# Altium PCB FYS_TMC5160_V1_2.PcbDoc
Units mil, origin at the board's own origin, x right, y up, seen from the top; angles counter-clockwise.
Board outline 600 x 800 mil, 6 copper layers (Top, P1, P2, VMOT, SIG, Bottom), stack 66.535 mil thick; 31 components, 45 nets, 162 pads, 113 vias.
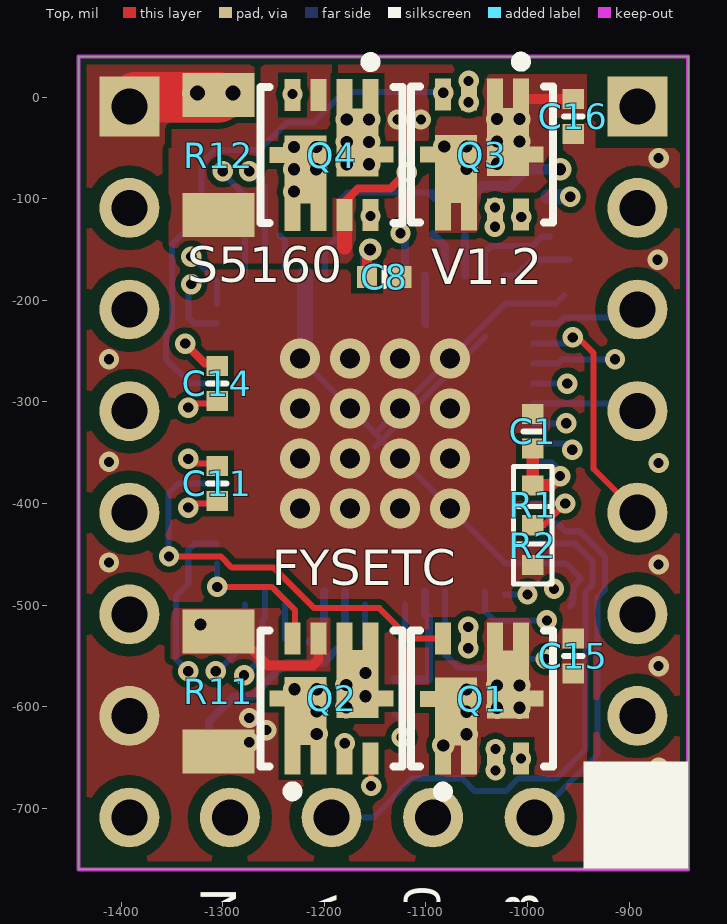
[diagram p0: Top view]
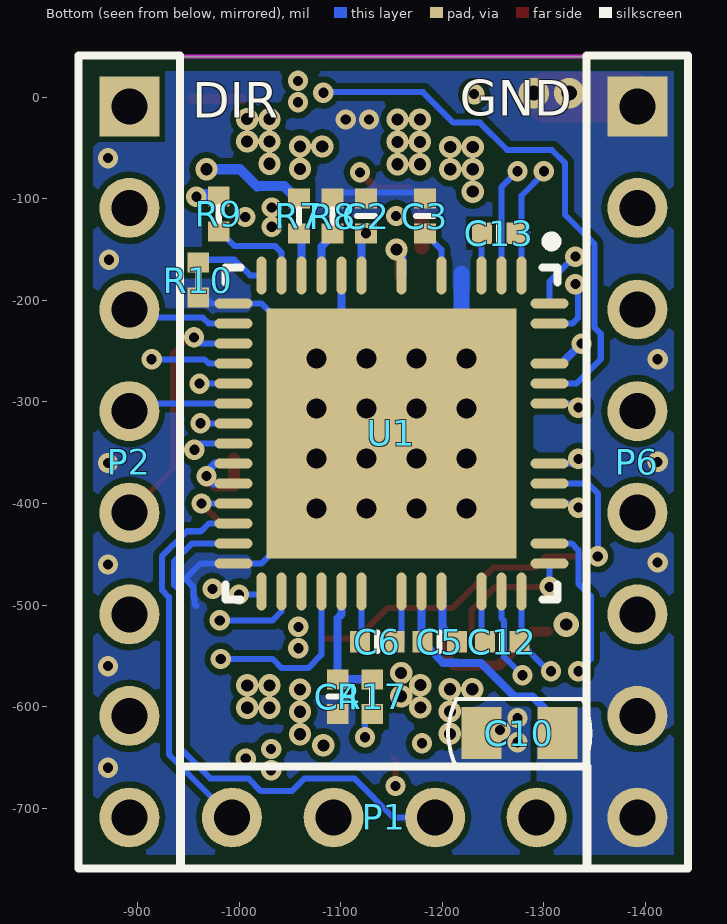
[diagram p1: Bottom view, seen from below]
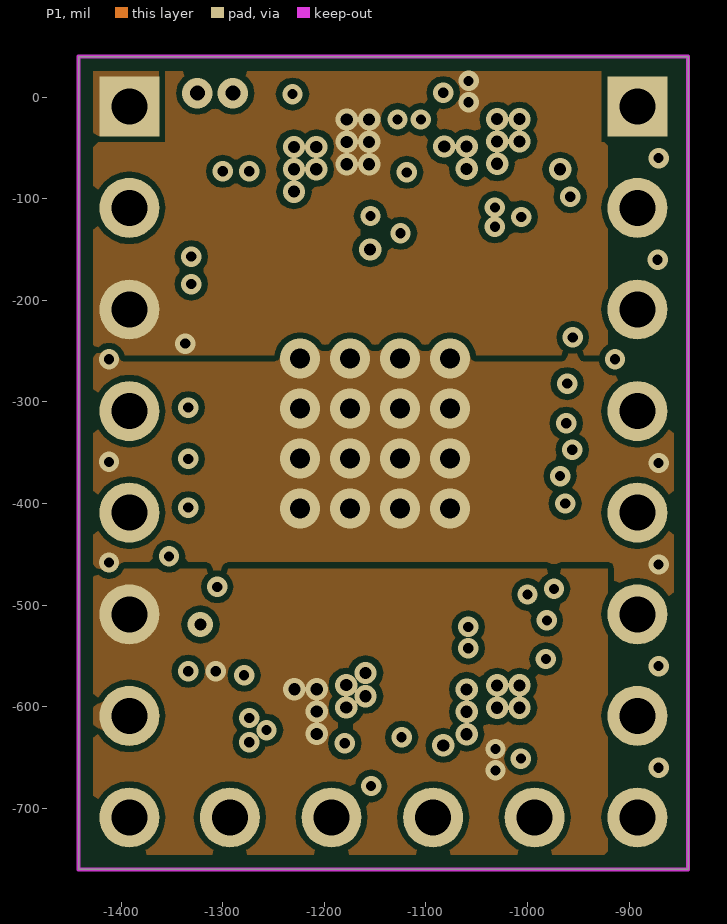
[diagram p2: P1]
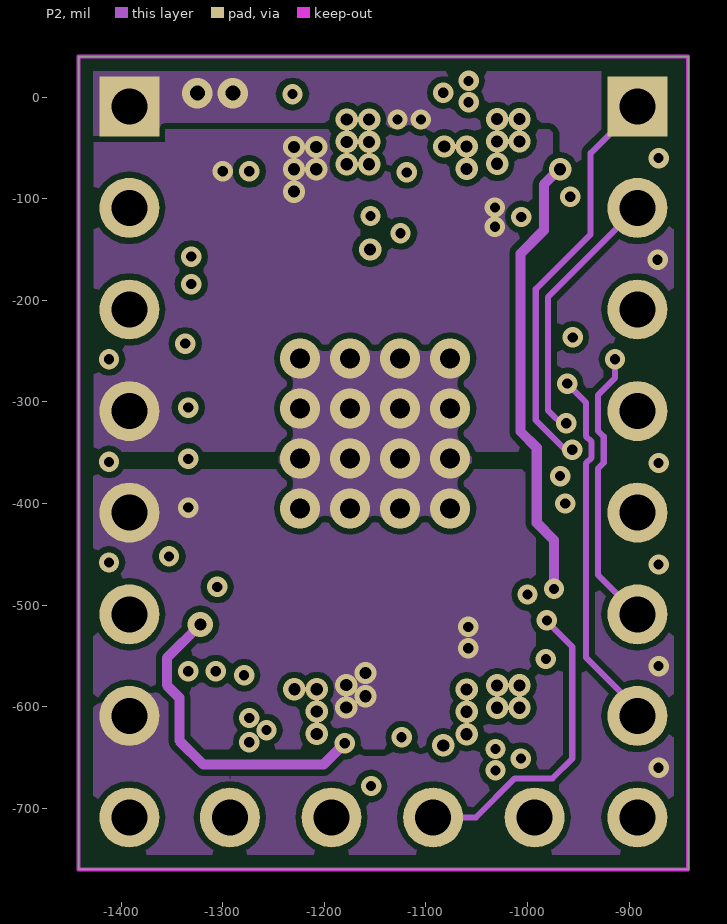
[diagram p3: P2]
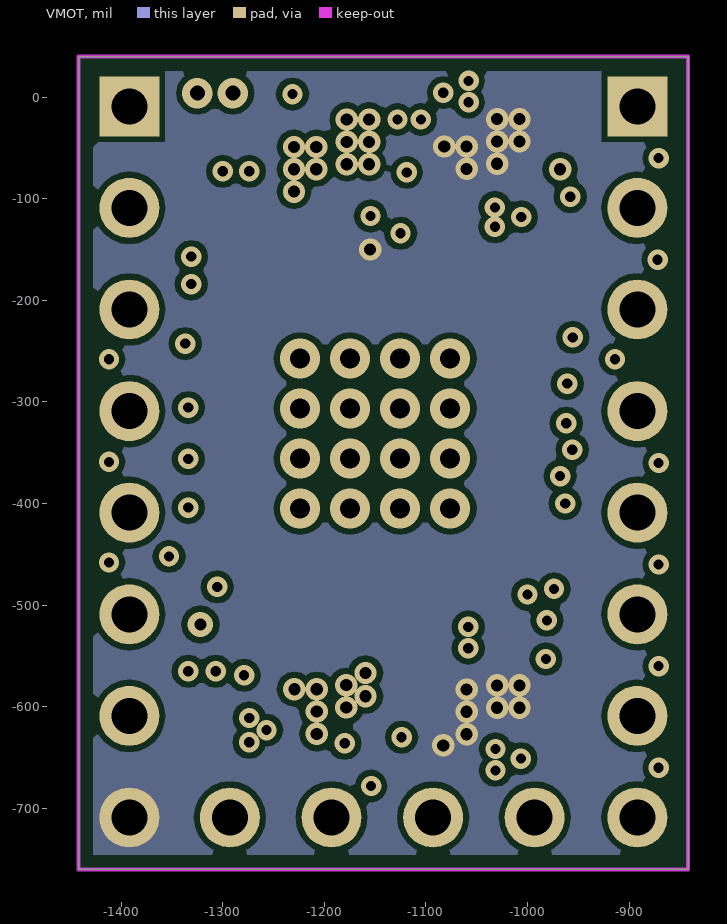
[diagram p4: VMOT]
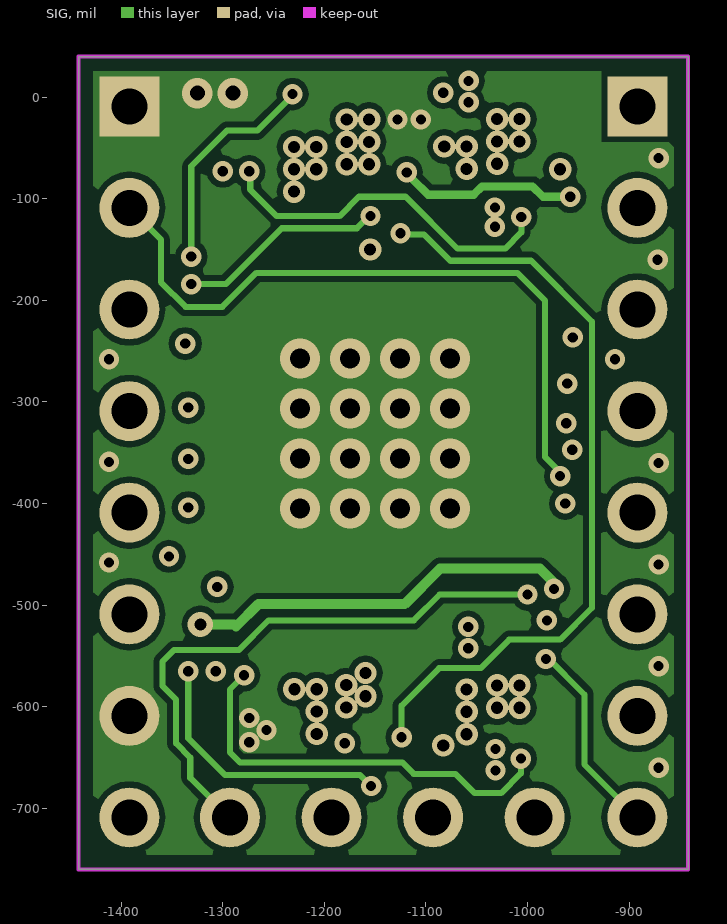
[diagram p5: SIG]
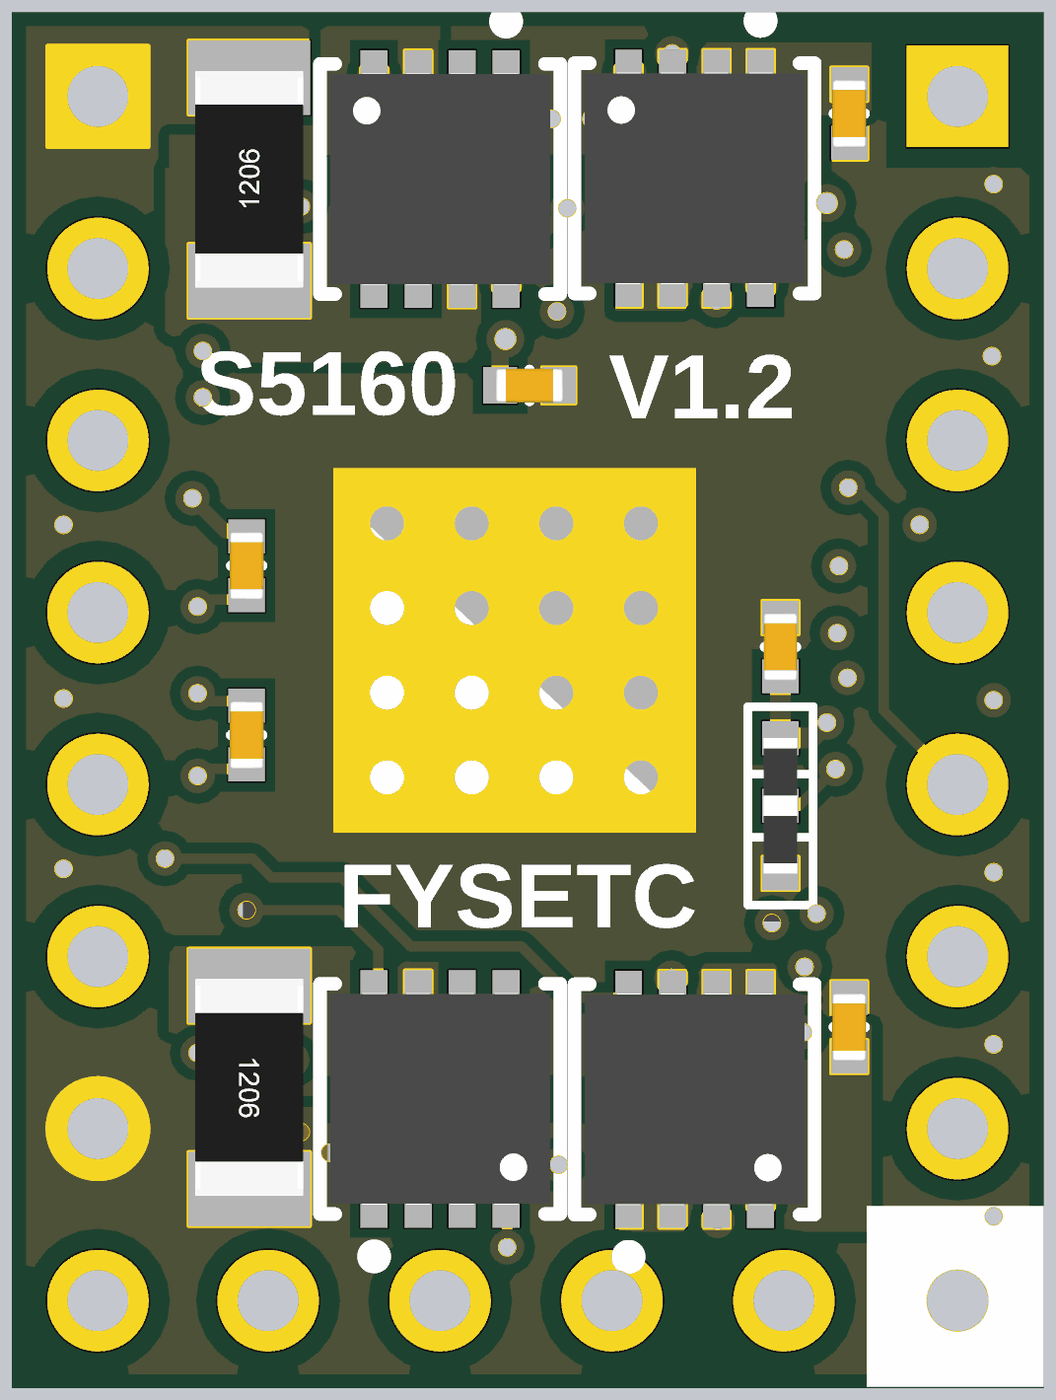
[diagram p6: 3D render of the assembled board from above, using the file's embedded part models]
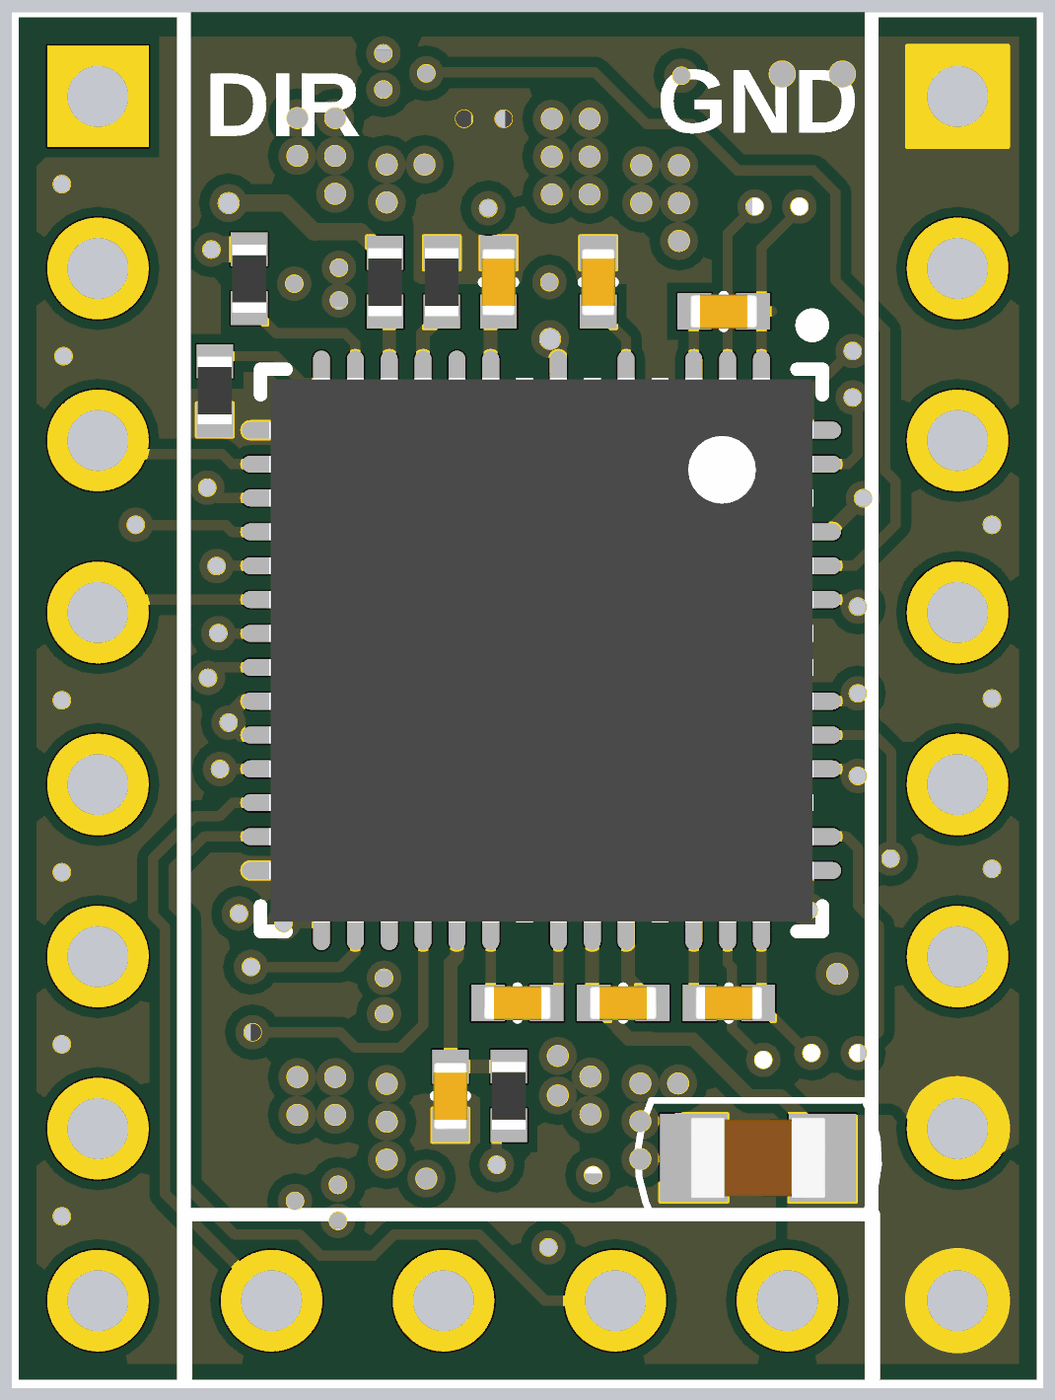
[diagram p7: 3D render of the assembled board from below, using the file's embedded part models]

## Layer stack, top to bottom
Top Solder: solder mask 0.4, Solder Resist, Dk 3.5
Top: signal copper 2.7559
Dielectric 1: core 10, FR-4, Dk 4.8
P1: signal copper 2.7559
Dielectric 2: prepreg 10, FR4, Dk 4.2
P2: signal copper 2.7559
Dielectric 3: prepreg 10, FR-4, Dk 4.2
VMOT: signal copper 2.7559
Dielectric 4: core 10, FR4, Dk 4.2
SIG: signal copper 2.7559
Dielectric 5: core 10, FR-4, Dk 4.2
Bottom: signal copper 2.7559
Bottom Solder: solder mask 0.4, Solder Resist, Dk 3.5

## Board outline
-1442,-760 -1442,40 -842,40 -842,-760

## Design rules (kind name [scope] priority, off if disabled: settings)
Clearance Clearance_1 [OnLayer('Top')] p1: gap=6 ignorepadtopadclearanceinfootprint=TRUE except(0: Arc-Hole Track-Hole SMDPad-Hole THPad-Hole Via-Hole Fill-Hole Poly-Hole Region-Hole Text-Hole; 12: THPad-Poly)
Clearance BoardOutlineClearance [OnLayer('Keep-Out Layer')] p2: gap=12 ignorepadtopadclearanceinfootprint=FALSE
Clearance "Fiducial Clearance" [HasFootprint('FIDUCIAL_40MIL')] p3: gap=26 ignorepadtopadclearanceinfootprint=FALSE except(0: Arc-Hole Track-Hole SMDPad-Hole THPad-Hole Via-Hole Fill-Hole Poly-Hole Region-Hole Text-Hole)
Clearance "Mounting Hole Clearance" [(HoleDiameter >= 110) And  IsPad  And ((PadYSize_AllLayers - HoleDiameter)  <=  1)] p4: gap=30 ignorepadtopadclearanceinfootprint=FALSE except(0: Arc-Hole Track-Hole SMDPad-Hole THPad-Hole Via-Hole Fill-Hole Poly-Hole Region-Hole Text-Hole)
Clearance [All] p5: gap=6 ignorepadtopadclearanceinfootprint=TRUE except(0: Arc-Hole Track-Hole SMDPad-Hole THPad-Hole Via-Hole Fill-Hole Poly-Hole Region-Hole Text-Hole)
ComponentClearance Pinheader2PinheaderClearance [InComponentClass('Pinheader') vs InComponentClass('Pinheader')] p1: gap=0 collisioncheckmode=3 verticalgap=0 showdistances=FALSE
ComponentClearance [All] p2: gap=0 collisioncheckmode=3 verticalgap=100000 showdistances=FALSE
DiffPairsRouting [All] p1 off: maxlimit=10 minlimit=7.5 mostfreqgap=10 toplayer_prefgap=7.5 toplayer_minwidth=7.5 toplayer_maxwidth=7.5 toplayer_prefwidth=7.5 midlayer1_prefgap=7.5 midlayer1_minwidth=7.5 midlayer1_maxwidth=7.5 midlayer1_prefwidth=7.5 midlayer2_mingap=10 midlayer2_minwidth=15 midlayer2_maxwidth=15 midlayer2_prefwidth=15 midlayer3_mingap=10 midlayer3_minwidth=15 midlayer3_maxwidth=15 midlayer3_prefwidth=15 midlayer4_mingap=10 midlayer4_minwidth=15 midlayer4_maxwidth=15 midlayer4_prefwidth=15 bottomlayer_prefgap=7.5 bottomlayer_minwidth=7.5 bottomlayer_maxwidth=7.5 bottomlayer_prefwidth=7.5 maxuncoupledlength=500
HoleSize [All] p1: absolutevalues=TRUE maxlimit=100000 minlimit=7.87 maxpercent=80.000 minpercent=20.000
HoleToHoleClearance [All] p1: gap=8 allowstackedmicrovias=TRUE
MatchedLengths "SD_CARD MatchedLengths" [InNetClass('SD_CARD')] p1: tolerance=10 checknetsindiffpair=FALSE checkdiffpairvsdiffpair=TRUE checkxsignals=TRUE checkothers=TRUE
MinimumAnnularRing MinimumViaAnnualRing [All] p1: minimumring=4.92
MinimumSolderMaskSliver STM32_MinimumSolderMaskSliver [(InComponent('STM1') AND InComponent('STM2')) vs (InComponent('STM1') AND InComponent('STM2'))] p1: minsoldermaskwidth=1
MinimumSolderMaskSliver USB_HUB_MinimumSolderMaskSliver [InComponent('USB_HUB')] p2: minsoldermaskwidth=1
MinimumSolderMaskSliver [All] p3 off: minsoldermaskwidth=1.5
PasteMaskExpansion TestPadPasteMaskExpansion [HasFootprint('SMD_TP_2X2_ROUND')] p1: expansion=-78.74
PasteMaskExpansion [All] p2: expansion=0
PlaneConnect [All] p1: planeconnectstyle=Direct reliefexpansion=20 reliefentries=4 reliefconductorwidth=10 reliefairgap=10
PolygonConnect SA_SB_PolygonConnect [InNet('SA') OR InNet('SB')] p1: connectstyle=Direct reliefconductorwidth=70 reliefentries=4 polygonreliefangle="90 Angle" airgapwidth=10
PolygonConnect VM_PolygonConnect [InNet('+VM')] p2: connectstyle=Direct reliefconductorwidth=70 reliefentries=4 polygonreliefangle="90 Angle" airgapwidth=10
PolygonConnect ThermalVias [IsVia] p3: connectstyle=Direct reliefconductorwidth=10 reliefentries=4 polygonreliefangle="90 Angle" airgapwidth=10
PolygonConnect MotorOutputConStyle [InNetClass('MotorPowerOut')] p4: connectstyle=Direct reliefconductorwidth=10 reliefentries=4 polygonreliefangle="90 Angle" airgapwidth=10
PolygonConnect [All] p5: connectstyle=Direct reliefconductorwidth=15 reliefentries=4 polygonreliefangle="90 Angle" airgapwidth=10
RoutingVias [All] p1: holewidth=12 width=22 viastyle="Through Hole" minholewidth=12 minwidth=22 maxholewidth=12 maxwidth=50
ShortCircuit [All] p1 off: allowed=FALSE
SilkToBoardRegionClearance [All] p1 off:
SilkToSilkClearance [All] p1 off: silktosilkclearance=10
SilkToSolderMaskClearance [IsPad] p1 off: minsilkscreentomaskgap=10 clearancetoexposedcopper=TRUE
SolderMaskExpansion FiducialSolderMaskExpansion [HasFootprint('FIDUCIAL_40MIL')] p1: expansion=26
SolderMaskExpansion [All] p2: expansion=4
UnRoutedNet [All] p1 off:
Width VIN_Width [InNetClass('PWR_VIN')] p1: maxlimit=300 minlimit=200 preferedwidth=210
Width Other_Width [All] p2: maxlimit=100000 minlimit=5 preferedwidth=11.81 midlayer3_prefwidth=10 midlayer4_prefwidth=10 minimp=50.000000 maximp=50.000000 favimp=50.000000
18 further rules are at their usual default settings.

## Classes and differential pairs
net class MotorPowerOut: BMA1 BMA2 BMB1 BMB2

## Components (designator, comment, footprint, x,y, rotation, side; value= is the part's Value field where it differs from the comment)
C1 "100nF" CAP0402_NS -995,-329 r90 top
C2 "2u2" CAP0402_NS -1125,-117 r90 bottom
C3 "2u2" CAP0402_NS -1183,-117 r270 bottom
C4 "470nF" CAP0402_NS -1097,-590.01 r270 bottom
C5 "100nF" CAP0402_NS -1197.5,-536 r180 bottom
C6 "22nF" CAP0402_NS -1136,-536 r180 bottom
C8 "100nF" CAP0402_NS -1141,-177 r0 top
C10 "10uF/50V/10%" CAP0805 -1276,-626 r180 bottom
C11 "220nF" CAP0402_NS -1305.51,-380.21 r270 top
C12 "220nF" CAP0402_NS -1259,-536 r180 bottom
C13 "220nF" CAP0402_NS -1256,-134 r180 bottom
C14 "220nF" CAP0402_NS -1305.51,-281.79 r90 top
C15 "470nF/50V" CAP0402_NS -955,-550 r90 top
C16 "470nF/50V" CAP0402_NS -955,-19 r270 top
P1 "Header 4" HDR1X4 -993,-709 r180 bottom locked
P2 "Header 8" HDR1X8 -892,-9 r270 bottom locked
P6 "Header 8" HDR1X8 -1392,-9 r270 bottom locked
Q1 "WSD3020DN" "DFN3X3-8L-DUAL - AON" -1044.97,-592 r0 top
Q2 "WSD3020DN" "DFN3X3-8L-DUAL - AON" -1192.97,-591.73 r0 top
Q3 "WSD3020DN" "DFN3X3-8L-DUAL - AON" -1044.97,-56.61 r180 top
Q4 "WSD3020DN" "DFN3X3-8L-DUAL - AON" -1192.97,-57 r180 top
R1 "0R" RES0402 -995,-401.68 r270 top
R2 "0R" RES0402 -995,-441 r270 top
R7 "47R /  / 1%" RES0402_NS -1059,-117 r270 bottom
R8 "47R /  / 1%" RES0402_NS -1092,-117 r270 bottom
R9 "47R /  / 1%" RES0402_NS -980,-115 r270 bottom
R10 "47R /  / 1%" RES0402_NS -960,-180 r90 bottom
R11 "75mR" R1206 -1303.97,-585 r270 top
R12 "75mR" R1206 -1303.97,-57.18 r90 top
R17 "2R2/1%/" RES0402_NS -1131,-589.99 r90 bottom
U1 "TMC5160_WA" "QFN8X8 WETTABLE" -1150,-331 r270 bottom locked

## Footprints (in the part's own frame and the unit in brackets; to place one, negate y for a bottom-side part, rotate by r counter-clockwise, add the part's x,y. Pads: shape width x height; smd on the part's side, far side on the other; paste and mask are expansions set on the pad)
CAP0402_NS [mm]
  rect 0.5x0.54 smd mask+0.025: 1(-0.433,0) 2(0.433,0)
  silkscreen extent 0,-0.23 0,0.23, body extent -0.5,-0.25 0.5,0.25, height 0.5
CAP0805 [mm]
  rect 1x1.3 smd mask+0.025: 1(-0.95,0) 2(0.95,0)
  silkscreen extent -1.78,-0.85 1.78,0.85, body extent -1,-0.6 1,0.6, height 1.2
"DFN3X3-8L-DUAL - AON" [mm] "QFN, 8-Leads, Body 3.15x3.00mm, Pitch 0.65mm, Thermal Pad 2.45x1.74mm, IPC Medium Density"
  rect 0.4x0.8 smd mask+0.025: 1(-0.325,1.5) 2(-0.975,1.5) 3(0.325,-1.5) 4(0.975,-1.5) 5(0.975,1.5) 6(0.325,1.5) 7(-0.975,-1.5) 8(-0.325,-1.5)
  rect 1.05x1.7 smd mask+0.025: 6(0.65,0.356) 8(-0.65,-0.319)
  rect 0.8x0.4 smd mask+0.025: 6(1.146,0) 8(-1.146,-0.01)
  silkscreen extent -1.78,-2.45 1.78,1.7, body extent -1.62,-1.56 1.63,1.56, height 1
HDR1X4 [mm] "Connector; Header; 4 Position"
  round 1.5 hole 0.9 mask+0.025: 1(0,0) 2(2.54,0) 3(5.08,0) 4(7.62,0)
  silkscreen extent -1.27,-1.27 8.89,1.27
HDR1X8 [mm] "Connector; Header; 8 Position"
  rect 1.5x1.5 hole 0.9 mask+0.025: 1(0,0)
  round 1.5 hole 0.9 mask+0.025: 2(2.54,0) 3(5.08,0) 4(7.62,0) 5(10.16,0) 6(12.7,0) 7(15.24,0) 8(17.78,0)
  silkscreen extent -1.27,-1.27 19.05,1.27
"QFN8X8 WETTABLE" [mm] "QFN, 56-Leads, Body 8.00x8.00mm, Pitch 0.50mm, Thermal Pad 6.25x6.25mm, IPC Low Density"
  oval 0.95x0.25 smd mask+0.025: 1(-3.95,3.25) 2(-3.95,2.75) 3(-3.95,2.25) 4(-3.95,1.25) 5(-3.95,0.25) 6(-3.95,-0.75) 7(-3.95,-1.25) 8(-3.95,-1.75) 9(-3.95,-2.25) 10(-3.95,-2.75) 11(-3.95,-3.25) 26(3.95,-3.25) 27(3.95,-2.75) 28(3.95,-2.25) 29(3.95,-1.75) 30(3.95,-1.25) 31(3.95,-0.75) 32(3.95,0.25) 33(3.95,0.75) 34(3.95,1.25) 35(3.95,2.25) 36(3.95,2.75) 37(3.95,3.25)
  oval 0.25x0.95 smd mask+0.025: 12(-3.25,-3.95) 13(-2.75,-3.95) 14(-2.25,-3.95) 15(-1.75,-3.95) 16(-1.25,-3.95) 17(-0.75,-3.95) 18(-0.25,-3.95) 19(0.25,-3.95) 20(0.75,-3.95) 21(1.25,-3.95) 22(1.75,-3.95) 23(2.25,-3.95) 24(2.75,-3.95) 25(3.25,-3.95) 38(3.25,3.95) 39(2.75,3.95) 40(1.75,3.95) 41(1.25,3.95) 42(0.75,3.95) 43(-0.75,3.95) 44(-1.25,3.95) 45(-1.75,3.95) 46(-2.75,3.95) 47(-3.25,3.95)
  rect 6.25x6.25 smd mask+0.025: 48(0,0)
  silkscreen extent -4.92,-4.15 4.15,4.15, body extent -4.02,-4.02 4.02,4.02, height 0.85
R1206 [mm] "1206 resistor"
  rect 1.1x1.8 smd mask+0.025: 1(-1.5,0) 2(1.5,0)
  body extent -1.6,-0.8 1.6,0.8, height 0.6
RES0402 [mm]
  rect 0.5x0.54 smd mask+0.025: 1(-0.5,0) 2(0.5,0)
  silkscreen extent -0.97,-0.48 0.97,0.48, body extent -0.5,-0.25 0.5,0.25, height 0.5
RES0402_NS [mm]
  rect 0.5x0.54 smd mask+0.025: 1(-0.433,0) 2(0.433,0)
  silkscreen extent -0.18,0 0.18,0, body extent -0.5,-0.25 0.5,0.25, height 0.5

## Part data
C1 C8: library part Capacitor, "Ceramic capacitor", Manufacturer=Multicomp, MPN=MC0603F104M500CT, Voltage rating=50V, Capacitance=100nF, ComponentLinknDescription=Datasheet, Precision=20%, Type=MLCC
C2 C3: library part "2.2 μF, 25 V, ± 10%, X5R, GRM Series", "SMD Multilayer Ceramic Capacitor, 0603 [1608 Metric], 2.2 μF, 25 V, ± 10%, X5R, GRM Series", MPN=GRM188R61E225KA12D, Voltage rating=50V, Capacitance=2u2, ComponentLinknDescription=Datasheet, MF=MURATA, Precision=10%, Type=MLCC
C4: library part Capacitor, "Ceramic capacitor", MPN=MC0603X474K160CT, Voltage rating=16V, Capacitance=470nF, ComponentLinknDescription=Datasheet, MF=Multicomp, Precision=10%, Type=MLCC
C5: library part Capacitor, "Ceramic capacitor", MPN=MC0603F104M500CT, Voltage rating=50V, Capacitance=100nF, ComponentLinknDescription=Datasheet, MF=Multicomp, Precision=20%, Type=MLCC
C6: library part Capacitor, "Ceramic capacitor", MPN=MC0603B223K500CT, Voltage rating=50V, Capacitance=22nF, ComponentLinknDescription=Datasheet, MF=Multicomp, Precision=20%, Type=MLCC
C10: library part "10 μF, 50 V, ± 20%, X5R, GRM Series", "SMD Multilayer Ceramic Capacitor, 1206 [3216 Metric], 10 μF, 50 V, ± 20%, X5R, GRM Series", Capacitance=10uF, MPN=GRM31CR61H106MA12L, VoltageRating=50V, ComponentLinknDescription=Datasheet, MF=MURATA, Precision=10%, Type=MLCC
C11 C12 C13 C14: library part "0.22 μF, 50 V, ± 10%, X7R", "SMD Multilayer Ceramic Capacitor, 0603 [1608 Metric], 0.22 μF, 50 V, ± 10%, X7R, GCM Series", MPN=GCM188R71H224KA64D, Voltage rating=50V, Capacitance=220nF, ComponentLinknDescription=Datasheet, MF=MURATA, Precision=10%, Type=MLCC
C15 C16: library part "0.47 μF, 50 V, ± 10%, X7R, C Series", "SMD Multilayer Ceramic Capacitor, 0603 [1608 Metric], 0.47 μF, 50 V, ± 10%, X7R, C Series", Capacitance=470nF, MPN=C1608X7R1H474K080AC, VoltageRating=50V, ComponentLinknDescription=Datasheet, MF=TDK, Precision=10%, Type=MLCC
P1: "Header, 4-Pin", LatestRevisionDate=17-Jul-2002, LatestRevisionNote="Re-released for DXP Platform.", Publisher="Altium Limited"
P2 P6: "Header, 8-Pin", LatestRevisionDate=17-Jul-2002, LatestRevisionNote="Re-released for DXP Platform.", Publisher="Altium Limited"
Q1 Q2 Q3 Q4: library part IRF7103, "HEXFET Power MOSFET", Code_IPC=SOIC127P600-8, Code_JEDEC=MS-012-AA, ComponentLink1Description="Manufacturer Link", ComponentLink1URL=http://www.irf.com/, ComponentLink2Description=Datasheet, ComponentLink2URL=http://www.irf.com/product-info/datasheets/data/irf7103.pdf, DatasheetVersion=Aug-1997, LatestRevisionDate=13-Apr-2006, LatestRevisionNote="IPC-7351 Footprint Added.", PackageDescription="8-Pin Plastic Small Outline Integrated Circuit 1.27 mm Pitch", PackageReference=SO-8, PackageVersion=Feb-2001, Published=8-Jun-2000, Publisher="Altium Limited"
R1 R2: library part "0 ohm, 0603 [1608 Metric], 100 mW, MCWR Series", "SMD Chip Resistor, Thick Film, 0 ohm, 0603 [1608 Metric], 100 mW, MCWR Series", MPN="MCWR06X000 PTL", PowerRating=100mW, Temp coefficient=*ppm, MF=MULTICOMP, Resistance=0R
R7 R8 R9 R10: library part "47 ohm, 75 V, 0603 [1608 Metric], 100 mW, ± 1%, MCSR 06 Series", "SMD Chip Resistor, Ceramic, 47 ohm, 75 V, 0603 [1608 Metric], 100 mW, ± 1%, MCSR 06 Series", MPN=MCSR06X47R0FTL, Resistance=47R, Temp coefficient=*ppm, MF=MULTICOMP, Precision=1%
R11 R12: library part "R_SENS, 0.075 ohm, 1206, 1W, ± 1%, ERJ Series", "SMD Chip Resistor, Thick Film, Current Sense Resistors - SMD 1W 0.075ohm 1%", MPN=ERJ-8BWFR075V, PowerRating=1W, Temp coefficient=*ppm, VoltageRating=50V, MF="Panasonic Electronic Components", Precision=1%, Resistance=75mR
R17: library part Resistor, "Resistor", MPN=MC0063W060312R2, Power rating=*mW, Resistance=2R2, Temp coefficient=*ppm, Voltage rating=*V, ComponentLinknDescription=Datasheet, MF=Multicomp, Precision=1%

## Via types
v1: diameter 20, hole 10, Top to Bottom, tented both sides, 57 vias
v2: diameter 22, hole 12, Top to Bottom, tented both sides, 37 vias
v3: diameter 39.37, hole 19.68, Top to Bottom, tented both sides, 16 vias
v4: diameter 30, hole 15, Top to Bottom, tented both sides, 2 vias
v5: diameter 25, hole 12, Top to Bottom, tented both sides, 1 vias

## Nets (pads, with @x,y where several pads share a name; then routed paths per layer and width w, separated by ;. In a path a pad name is that pad's centre, name@x,y a point inside that pad or via, vN(x,y) a via of type N, cw(c..) or ccw(c..) an arc to the next point about the centre after c; other vN are vias at no path point)
5V_OUT: C2.1 R17.1 U1.6 | length 834.5
  SIG w6: v1@-1126,-135 -1102,-135 -1076,-161 -996.58,-161 -936.58,-221 -936.58,-502.58 -968,-534 -1018,-534 -1046,-562 -1087,-562 -1124,-599 v1(-1124,-630)
  Bottom w6: R17.1 -1124,-614.03 v1(-1124,-630) v1@-1124,-631 ; C2.1@-1121,-133 C2.1@-1120.47,-133.53
  Bottom w8: U1.6 C2.1@-1120.47,-133.53
  other v1: -1125,-134
+VM: C5.1 C8.1 C10.2 C15.1 C16.1 P6.8 Q1.5 Q1.6 Q1.7 Q1.8 Q3.5 Q3.6 Q3.7 Q3.8 U1.5 U1.33 | length 352.2
  Top w10: C8.1 -1158.06,-154.06 v2@-1152,-148 ; Q3.7@-1003,-2 -1002.94,-1.94 C16.1 C16.1@-954,-1.94
  Bottom w8: C10.2 -1313.4,-614.4 -1289,-590 -1271,-590 -1238,-557 -1214,-557 ; U1.33 -1179.53,-535.09 C5.1 -1194.69,-550.25 -1194.69,-550.77 -1200.55,-556.63 ; -1214,-557 -1200.92,-557 ; -1214,-557 -1213.63,-556.63 -1200.92,-556.63 ; -1200.92,-557 -1200.92,-556.63 ; -1200.92,-557 -1200.55,-556.63 ; -1200.92,-556.63 -1200.55,-556.63
  Bottom w10: U1.5 -1159.84,-151.84 v2@-1155,-147
  other v2: -1083,-638 -1060,-627 -1060,-605 -1030,-601 -1008,-601 -1060,-583 -1030,-579 -1008,-579 -1155,-150 -1059.97,-70.61 -1029.97,-65.61 -1081.97,-48.61 -1059.97,-48.61 -1029.97,-43.61 -1007.97,-43.61 -1029.97,-21.61 -1007.97,-21.61
BMA1: C11.2 P6.5 Q1.1 Q2.5 Q2.6 U1.40 | length 60.4
  Top w6: v1(-1334,-404) -1329.9,-399.9 C11.2@-1305.51,-399.9
  Bottom w6: v1(-1334,-404) -1329.9,-399.9 U1.40
  other v1: -1058.39,-542.35 -1058.39,-521.35
  other v2: -1178.49,-600.73 -1159.49,-589.73 -1178.49,-578.73 -1159.49,-566.73
BMA2: C12.2 P6.6 Q1.3 Q2.7 Q2.8 U1.37 | length 77.2
  Bottom w6: v1(-1307,-565) -1305.03,-565 C12.2 ; C12.2@-1277.95,-533.73 U1.37@-1277.95,-499.51
  other v1: -1031.61,-662.65 -1031.61,-641.65
  other v2: -1207.49,-626.73 -1207.49,-604.73 -1229.49,-582.73 -1207.49,-582.73
BMB1: C13.2 P6.4 Q3.1 Q4.5 Q4.6 U1.1 | length 118.8
  Bottom w6: v1@-1302,-73 -1278,-97 -1278,-129.04 C13.2 ; -1284,-134 C13.2@-1280.04,-134 ; U1.1 -1277.95,-134.95 C13.2@-1277,-134
  other v1: -1032.18,-127.61 -1032.18,-108.61 -1300,-73
  other v2: -1229.97,-93 -1229.97,-71 -1207.97,-71 -1229.97,-49 -1207.97,-49
BMB2: C14.2 P6.3 Q3.3 Q4.7 Q4.8 U1.45 | length 79.2
  Top w8: v1(-1337,-242.57) -1317.47,-262.1 C14.2@-1305.51,-262.1
  Bottom w8: v1(-1337,-242.57) -1317.47,-262.1 U1.45
  other v1: -1058,-5 -1058,16
  other v2: -1177.97,-66 -1155.97,-66 -1177.97,-44 -1155.97,-44 -1177.97,-22 -1155.97,-22
CA1: C11.1 U1.42 | length 60.7
  Top w6: v1(-1334,-356) -1329.47,-360.53 C11.1@-1305.51,-360.53
  Bottom w6: v1(-1334,-356) -1329.47,-360.53 U1.42
CA2: C12.1 U1.35 | length 34.5
  Bottom w6: C12.1@-1238.58,-534 U1.35@-1238.58,-499.51
CB1: C13.1 U1.3 | length 41.7
  Bottom w6: C13.1@-1244,-136 -1238.58,-141.42 U1.3
CB2: C14.1 U1.43 | length 60.4
  Top w6: v1(-1334,-305.57) -1329.9,-301.47 C14.1@-1305.51,-301.47
  Bottom w6: v1(-1334,-305.57) -1329.9,-301.47 U1.43
CLK16: P2.3 U1.13 | length 104.9
  Bottom w6: U1.13 -970,-222.73 -964.27,-217 P2.3@-894,-217 ; P2.3@-894,-209 P2.3
CSN: P2.5 U1.14 | length 243.2
  Top w6: v1@-950.58,-236.42 -935,-252 -935,-366 P2.5
  Bottom w6: U1.14 -961.58,-242.42 v1(-955.58,-236.42) v1@-950.58,-236.42
DIAG0/ERROR: P1.2 U1.27 | length 396.3
  P2 w6: P1.2 -1051,-709 -1012.47,-670.47 -975.47,-670.47 -956,-651 -956,-541 -981,-516 v1(-981,-515) v1@-981,-513
  Bottom w6: U1.27 -1041.73,-506.27 -1033,-515 v1@-983,-515 ; v1(-981,-515) v1@-983,-515 ; v1@-981,-513 v1@-983,-515
DIAG1/INDEX: U1.28
DIR/REFR: P2.1 U1.19 | length 439.4
  P2 w6: v1(-956,-347) -962.87,-347 -992,-317.87 -992,-189 -938,-135 -938,-55 P2.1
  Bottom w6: U1.19 -962.16,-340.84 v1(-956,-347)
DRV_ENN: P2.8 U1.29 | length 366.5
  SIG w6: v1@-982,-551 -981,-551 -944,-588 -944,-657 P2.8
  Bottom w6: U1.29 -1081.1,-548.9 -1068,-562 -1042,-562 -1033,-553 v1(-982,-553)
ENCA: P1.3 U1.24 | length 541.9
  Bottom w6: P1.3 -1152,-709 -1113.47,-670.47 -1064.53,-670.47 -1052,-683 -1021.49,-683 -1008.96,-670.47 -971.47,-670.47 -943,-642 -943,-487.03 -936,-480.03 -936,-457 -953.73,-439.27 U1.24
ENCB: P1.1 U1.23 | length 369.5
  Bottom w6: U1.23 -970.42,-419.58 -962.73,-427.27 -948.76,-427.27 -924,-452.03 -924,-485 -931,-492 -931,-646.97 -932,-647.97 P1.1
ENCN: P1.4 U1.26 | length 589.8
  SIG w6: P1.4 -1332,-670 -1332,-649.97 -1346,-635.97 -1346,-593 -1359.49,-579.51 -1359.49,-555.64 -1347.85,-544 -1284,-544 -1255,-515 -1112,-515 -1086.51,-489.51 v1(-1000,-489.51)
  Bottom w6: U1.26@-1022.05,-489.51 v1(-1000,-489.51)
GND: C1.2 C2.2 C3.1 C4.2 C8.2 C10.1 C15.2 C16.2 P6.1 P6.7 R2.2 R8.1 R10.1 R11.2 R12.2 U1.7 U1.12 U1.25 U1.48 | length 1118.3
  Top w6: P6.1@-1394,-6 P6.1@-1386.12,1.88
  Top w50: P6.1@-1386.12,-0.12 R12.2@-1303.97,-0.12
  Bottom w6: U1.48@-1218,-263 U1.48 ; C3.1 -1177.06,-94 R8.1@-1090,-94 ; U1.48@-1150,-344 U1.48@-1143.5,-337.5 ; U1.48@-1100.79,-223.21 U1.48@-1100,-224 ; R8.1@-1096.95,-95 R8.1 ; U1.48@-1041.73,-235.73 U1.48@-1143.5,-337.5 ; R10.1@-964,-195 -972.05,-203.05 U1.12 -994.49,-203.19 -1022.19,-203.19 U1.48 ; -958,-501 -958,-500.87 -956,-498.87 -956,-492.87 -955,-491.87 -955,-482.06 -948,-475.06 -948,-473 -962.05,-458.95 U1.25 -994.49,-458.81 -1022.19,-458.81 -1124.9,-356.1 U1.48@-1143.5,-337.5 ; U1.48 U1.48@-1143.5,-337.5
  Bottom w8: U1.48@-1100.79,-223.21 U1.7
  Bottom w16: U1.48@-1219,-263 -1219,-174
  other v1: -871,-660 -1274,-635 -1257,-623 -1274,-611 -871,-560 -871,-460 -1412,-458 -871,-360 -1412,-359 -1412,-258 -872,-160 -871,-60 -1128,-22 -1105,-22
  other v3: -1223.82,-404.82 -1174.61,-404.82 -1125.39,-404.82 -1076.18,-404.82 -1223.82,-355.61 -1174.61,-355.61 -1125.39,-355.61 -1076.18,-355.61 -1223.82,-306.39 -1174.61,-306.39 -1125.39,-306.39 -1076.18,-306.39 -1223.82,-257.18 -1174.61,-257.18 -1125.39,-257.18 -1076.18,-257.18
  other v4: -1325,4 -1290,4
HA1: Q1.2 U1.41 | length 416.9
  Top w6: v1(-1353,-452) -1302,-452 -1291,-463 -1250,-463 -1210,-503 -1146,-503 -1116.06,-532.94 Q1.2
  Bottom w6: v1@-1353.47,-452 -1353.47,-390.47 -1343.21,-380.21 U1.41
HA2: Q1.4 U1.36 | length 498.4
  SIG w6: v1(-1279,-569) -1293,-583 -1293,-645 -1283,-655 -1123,-655 -1112,-666 -1071,-666 -1052,-685 -1026,-685 -1006.61,-665.61 v1(-1006.61,-651.06)
  Bottom w6: v1(-1279,-569) -1260.78,-550.78 -1260.78,-515.25 -1258.27,-512.73 U1.36
HB1: Q3.2 U1.2 | length 460.1
  SIG w6: v1@-1273,-70 -1273,-91 -1247,-117 -1185,-117 -1166,-98 -1120,-98 -1069,-149 -1022,-149 -1006.18,-133.18 ; v1(-1006.18,-117.87) -1006.18,-133.18 ; -1006,-133 -1006.18,-133.18
  Bottom w6: v1@-1276,-73 v1@-1275,-74 ; v1(-1274,-73) -1258.27,-88.73 U1.2
HB2: Q3.4 U1.44 | length 534.8
  Bottom w6: U1.44 -1332.21,-281.79 -1356,-258 -1356,-233 -1350,-227 -1350,-145 -1321,-116 -1321,-65 -1308,-52 -1264,-52 -1237,-25 -1211,-25 -1181,5 v1@-1083,5
  other v1: -1083,4.41
LA1: Q2.4 U1.39 | length 451.8
  Top w6: v1@-1154,-676 -1154,-652.68 Q2.4@-1152.1,-650.79
  SIG w6: v1@-1334,-570 -1334,-631 -1298,-667 -1165,-667 v1(-1154,-678)
  Bottom w6: v1@-1334,-570 v1(-1334,-565) -1346.18,-552.82 -1346.18,-491.18 -1334,-479 -1334,-446 -1327.27,-439.27 U1.39
LA2: Q2.2 U1.38 | length 138.8
  Top w6: v1(-1305.51,-482) -1252,-482 -1228.87,-505.13 Q2.2@-1228.87,-532.68
  Bottom w6: v1@-1305.51,-484 v1(-1305.51,-482) U1.38
LB1: Q4.4 U1.47 | length 274.9
  SIG w6: v1(-1331,-157) -1331,-68 -1296,-33 -1266,-33 v1@-1232,1 ; v1@-1232.5,1.5 v1@-1231,3
  Bottom w6: v1@-1330,-157 -1305.51,-181.49 U1.47
  other v1: -1231.36,3
LB2: Q4.2 U1.46 | length 272.5
  SIG w6: v1(-1331,-184) -1297,-184 -1242,-129 -1168,-129 v1@-1154,-115
  Bottom w6: v1@-1331,-182 -1333.77,-184.77 -1333.77,-217.23 -1328.27,-222.73 U1.46
  other v1: -1154.59,-117
NetC3_2: C3.2 U1.4 | length 45.4
  Bottom w6: U1.4 -1199.21,-150.21 C3.2@-1185,-136
NetC5_2: C5.2 U1.34 | length 56.5
  Bottom w8: C5.2 -1200.28,-521.75 -1200.28,-486.51 U1.34
NetC6_1: C6.1 U1.31 | length 35
  Bottom w6: U1.31@-1120.47,-499.51 -1120.47,-532.84 C6.1@-1119.31,-534
NetC6_2: C6.2 U1.32 | length 41.3
  Bottom w6: C6.2@-1159.84,-540.84 U1.32@-1159.84,-499.51
SA: Q2.1 Q2.3 R7.1 R11.1 | length 1385.6
  Top w10: R11.1 -1289.06,-525.94 -1255.57,-559.43 -1211.43,-559.43 -1205.77,-553.77 Q2.1
  P2 w10: v5(-1322,-519) -1355,-552 -1355,-578.7 -1342.7,-591 -1342.7,-633.3 -1319,-657 -1201,-657 v1(-1180,-636) ; v1(-974,-484) -974,-436 -991,-419 -991,-345 -1007,-329 -1007,-154 -984,-131 -984,-86 v2@-965,-67
  SIG w10: v5(-1322,-519) -1289,-519 -1287,-521 -1265,-499 -1121,-499 -1086,-464 -988,-464 -974,-478 v1(-974,-484)
  Bottom w10: R7.1 -1056.95,-99.95 -1044.61,-87.61 -1017.61,-87.61 ; -1018,-88 -1017.61,-87.61 ; v2(-968,-71) -1001,-71 -1017.61,-87.61
SB: Q4.1 Q4.3 R9.1 R12.1 | length 302.7
  Top w8: Q4.1 -1180.18,-103.18 -1167,-90 -1135,-90 v1(-1119,-74)
  Top w15: -1180.18,-147.61 Q4.1
  SIG w8: v1@-1112.5,-81.5 -1098,-96 -1053,-96 -1045,-88 -995,-88 -985,-98 v1(-958,-98)
  Bottom w15: R9.1 v1@-963,-97.95
SCK: P2.6 U1.15 | length 360.6
  P2 w6: v1(-914,-258) -914,-276.51 -930.53,-293.04 -930.53,-328.63 -925,-334.16 -925,-359.84 -930.53,-365.37 -930.53,-470.47 -906.51,-494.49 P2.6
  Bottom w6: U1.15 -970,-262.1 -966,-258.1 -914.1,-258.1 v1(-914,-258)
SD_MODE: C1.1 P6.2 R1.1 U1.20 U1.21 | length 798.8
  Top w12: C1.1@-995,-355.68 R1.1 -977,-382 v1(-968,-373)
  SIG w6: P6.2 -1361,-140 -1361,-182 -1336.5,-206.5 -1300.5,-206.5 -1267,-173 -1010,-173 -983,-200 -983,-354 -968,-369 v1(-968,-373)
  Bottom w8: U1.21 -975.21,-380.21 v1(-968,-373) -968,-369 -976.47,-360.53 U1.20
SDI: P2.7 U1.16 | length 373.1
  P2 w6: v1(-961,-282) -942.53,-300.47 -942.53,-333.6 -937,-339.13 -937,-354.87 -942.53,-360.4 -942.53,-551.47 P2.7@-900,-594
  Bottom w6: U1.16 v1@-963.21,-281.79
SDO: P2.4 U1.17 | length 105.6
  Bottom w6: U1.17 -899.53,-301.47 P2.4
SPI_MODE: R1.2 R2.1 U1.22 | length 72.3
  Top w6: R2.1 -984.31,-421.31 v1(-963,-400)
  Bottom w6: U1.22 v1@-963,-399.9
SRAH: R7.2 U1.9 | length 39.7
  Bottom w6: R7.2@-1061.42,-136.42 R7.2@-1061,-136
  Bottom w8: U1.9 R7.2@-1061.42,-136.42
SRAL: R8.2 U1.8 | length 45.4
  Bottom w8: R8.2@-1093,-135 -1081.1,-146.9 U1.8
SRBH: R9.2 U1.10 | length 93
  Bottom w6: U1.10 -1041.73,-152.73 -1035.61,-146.61 -995.61,-146.61 -986,-137 R9.2@-978,-137
SRBL: R10.2 U1.11 | length 69.5
  Bottom w6: U1.11 -1011,-175.49 -995.51,-160 R10.2@-959,-160
STEP/REFL: P2.2 U1.18 | length 295.4
  P2 w6: v1@-962,-326 -980,-308 -980,-197 P2.2
  Bottom w6: U1.18 -966.84,-321.16 v1@-962,-326
  other v1: -962,-321
VCC: C4.1 R17.2 U1.30 | length 122
  Bottom w8: R17.2 C4.1 -1097,-512.9 -1100.79,-509.11 U1.30
copper on no net: | length 78248
  Top w1: 1266.18,-711.56 1343.74,-634 1463.74,-514 1583.74,-394 1703.74,-274 1823.74,-154 ; 1266.18,-651.56 1283.74,-634 1403.74,-514 1523.74,-394 1643.74,-274 1763.74,-154 1823.74,-94 ; 1266.18,-591.56 1343.74,-514 1463.74,-394 1583.74,-274 1703.74,-154 1823.74,-34 ; 1266.18,-531.56 1283.74,-514 1403.74,-394 1523.74,-274 1643.74,-154 1763.74,-34 1823.74,26 ; 1266.18,-471.56 1343.74,-394 1463.74,-274 1583.74,-154 1703.74,-34 1823.74,86 ; 1266.18,-411.56 1283.74,-394 1403.74,-274 1523.74,-154 1643.74,-34 1763.74,86 1823.74,146 ; 1266.18,-351.56 1343.74,-274 1463.74,-154 1583.74,-34 1703.74,86 1823.74,206 ; 1266.18,-291.56 1283.74,-274 1403.74,-154 1523.74,-34 1643.74,86 1763.74,206 1823.74,266 ; 1266.18,-231.56 1343.74,-154 1463.74,-34 1583.74,86 1703.74,206 1823.74,326 ; 1266.18,-171.56 1283.74,-154 1403.74,-34 1523.74,86 1643.74,206 1763.74,326 1823.74,386 ; 1266.18,-111.56 1343.74,-34 1463.74,86 1583.74,206 1703.74,326 1823.74,446 ; 1266.18,-51.56 1283.74,-34 1403.74,86 1523.74,206 1643.74,326 1763.74,446 1823.74,506 ; 1266.18,8.44 1343.74,86 1463.74,206 1583.74,326 1703.74,446 1823.74,566 ; 1266.18,68.44 1283.74,86 1403.74,206 1523.74,326 1643.74,446 1763.74,566 1823.74,626 ; 1266.18,128.44 1343.74,206 1463.74,326 1583.74,446 1703.74,566 1823.74,686 ; 1266.18,188.44 1283.74,206 1403.74,326 1523.74,446 1643.74,566 1763.74,686 1823.74,746 ; 1266.18,248.44 1343.74,326 1463.74,446 1583.74,566 1703.74,686 1823.74,806 ; 1266.18,308.44 1283.74,326 1403.74,446 1523.74,566 1643.74,686 1763.74,806 1823.74,866 ; 1266.18,368.44 1343.74,446 1463.74,566 1583.74,686 1703.74,806 1823.74,926 ; 1266.18,428.44 1283.74,446 1403.74,566 1523.74,686 1643.74,806 1763.74,926 1823.74,986 ; 1266.18,488.44 1343.74,566 1463.74,686 1583.74,806 1703.74,926 1823.74,1046 ; 1266.18,548.44 1283.74,566 1403.74,686 1523.74,806 1643.74,926 1763.74,1046 ; 1266.18,608.44 1343.74,686 1463.74,806 1583.74,926 1703.74,1046 ; 1266.18,668.44 1283.74,686 1403.74,806 1523.74,926 1643.74,1046 ; 1266.18,728.44 1343.74,806 1463.74,926 1583.74,1046 ; 1266.18,788.44 1283.74,806 1403.74,926 1523.74,1046 ; 1266.18,848.44 1343.74,926 1463.74,1046 ; 1266.18,908.44 1283.74,926 1403.74,1046 ; 1266.18,968.44 1343.74,1046 ; 1266.18,1028.44 1283.74,1046 ; 1283.74,-754 1403.74,-634 1523.74,-514 1643.74,-394 1763.74,-274 1823.74,-214 ; 1343.74,-754 1463.74,-634 1583.74,-514 1703.74,-394 1823.74,-274 ; 1403.74,-754 1523.74,-634 1643.74,-514 1763.74,-394 1823.74,-334 ; 1463.74,-754 1583.74,-634 1703.74,-514 1823.74,-394 ; 1523.74,-754 1643.74,-634 1763.74,-514 1823.74,-454 ; 1583.74,-754 1703.74,-634 1823.74,-514 ; 1643.74,-754 1763.74,-634 1823.74,-574 ; 1703.74,-754 1823.74,-634 ; 1763.74,-754 1823.74,-694
  Top w15: -597,-634 -345.91,-634 139.67,-634 576.02,-634 934.45,-634 1266.18,-634 1823.74,-634 ; -597,-514 -345.91,-514 139.67,-514 576.02,-514 934.45,-514 1266.18,-514 1823.74,-514 ; -597,-394 -345.91,-394 139.67,-394 576.02,-394 934.45,-394 1266.18,-394 1823.74,-394 ; -597,-274 -345.91,-274 139.67,-274 576.02,-274 934.45,-274 1266.18,-274 1823.74,-274 ; -597,-154 -345.91,-154 139.67,-154 576.02,-154 934.45,-154 1266.18,-154 1823.74,-154 ; -597,-34 -345.91,-34 139.67,-34 576.02,-34 934.45,-34 1266.18,-34 1823.74,-34 ; -597,86 -345.91,86 139.67,86 576.02,86 934.45,86 1266.18,86 1823.74,86 ; -597,206 -345.91,206 139.67,206 576.02,206 934.45,206 1266.18,206 1823.74,206 ; -597,326 -345.91,326 139.67,326 576.02,326 934.45,326 1266.18,326 1823.74,326 ; -597,446 -345.91,446 139.67,446 576.02,446 934.45,446 1266.18,446 1823.74,446 ; -597,566 -345.91,566 139.67,566 576.02,566 934.45,566 1266.18,566 1823.74,566 ; -597,686 -345.91,686 139.67,686 576.02,686 934.45,686 1266.18,686 1823.74,686 ; -597,806 -345.91,806 139.67,806 576.02,806 934.45,806 1266.18,806 1823.74,806 ; -597,926 -345.91,926 139.67,926 576.02,926 934.45,926 1266.18,926 1823.74,926 ; -597,1046 1823.74,1046 ; -345.91,1166 -345.91,-754 ; 139.67,1166 139.67,-754 ; 576.02,1166 576.02,-754 ; 934.45,1166 934.45,-754 ; 1266.18,1166 1266.18,-754 ; -345.91,-754 -597,-754 -597,1166 1823.74,1166 1823.74,-754 1266.18,-754 ; -345.91,-754 139.67,-754 ; 139.67,-754 576.02,-754 ; 576.02,-754 934.45,-754 ; 934.45,-754 1266.18,-754

## Polygon pours and split planes (outlines as drawn)
GND on Top "GND_L01_P218" (solid, pour order 218): -1440.37,40.22 -1440.37,-759.78 -840.37,-759.78 -840.37,40.22
+VM on Top "NONET_L01_P-001" (solid, pour order 216): -941.97,-44.97 -992.72,-95.72 -992.71,-133.61 -1090.97,-133.61 -1090.97,22.39 -941.97,22.39
+VM on Top "NONET_L01_P-001" (solid, pour order 214): -1091,-513 -1091,-669 -942,-669 -942,-513
SA on Top "NONET_L01_P-001" (solid, pour order 212): -1351,-503 -1351,-567 -1328,-590 -1218,-590 -1190,-562 -1190,-505 -1192,-503
SB on Top "NONET_L01_P-001" (solid, pour order 200): -1254.97,68.39 -1271.57,28.1 -1352.97,28.09 -1352.97,-146.61 -1335.97,-163.61 -1170.97,-163.61 -1168.97,-161.61 -1168.97,-99.61 -1192.98,-99.61 -1192.98,57.39 -1203.97,68.39
GND on P2 "NONET_L01_P-001" (solid, pour order 222): -1442,39 -1442,-760 -842,-760 -842,40
BMB1 on P2 "NONET_L01_P-001" (solid, pour order 196): -975,-31.61 -1094.01,-31.61 -1427,-31.61 -1427,-349 -975,-349
BMA1 on P2 "NONET_L01_P-001" (solid, pour order 161): -992,-642.01 -992,-366 -1291,-366 -1432,-366 -1432.01,-642
GND on SIG "GND_L05_P175" (solid, pour order 175): -1448.87,42.31 -1448.87,-757.69 -835.87,-757.68 -835.87,42.31
GND on Bottom "GND_L06_P208" (solid, pour order 208): -1440.73,42.39 -1440.73,-757.61 -840.73,-757.61 -840.73,42.39
+VM on Bottom "NONET_L01_P-001" (solid, pour order 206): -1442,-760 -1293,-760 -1293,-606 -1298,-601 -1443,-601
GND on P1 "NONET_L01_P-001" (solid, pour order 220): -839,40 -839,-760 -1439,-760 -1439,40
BMA2 on P1 "NONET_L01_P-001" (solid, pour order 204): -1440.22,-758 -921,-758 -921,-464 -1442.8,-464
BMB2 on P1 "NONET_L01_P-001" (solid, pour order 202): -1440.22,40 -921,40 -921,-254 -1442.8,-254
+VM on VMOT "NONET_L01_P-001" (solid, pour order 193): -842,40 -842,-758 -844,-760 -1442,-760 -1442,40
no net on Top Overlay "NONET_L01_P-001" (solid): -842,-760

## Keep-outs
Keep-Out Layer:
  the board outline again, w4

## Other copper
Top:
  text "Layer" at -537,1076 h60
  text "Name" at -285.91,1076 h60
  text "Material" at 199.67,1076 h60
  text "Thickness" at 636.02,1076 h60
  text "Constant" at 994.45,1076 h60
  text "Board Layer Stack" at 1326.18,1076 h60
  text "1" at -537,956 h60
  text "Top Overlay" at -285.91,956 h60
  text "2" at -537,836 h60
  text "Top Solder" at -285.91,836 h60
  text "Solder Resist" at 199.67,836 h60
  text "0.010mm" at 636.02,836 h60
  text "3.5" at 994.45,836 h60
  text "3" at -537,716 h60
  text "Top" at -285.91,716 h60
  text "Copper" at 199.67,716 h60
  text "0.070mm" at 636.02,716 h60
  text "4" at -537,596 h60
  text "Dielectric 1" at -285.91,596 h60
  text "FR-4" at 199.67,596 h60
  text "0.254mm" at 636.02,596 h60
  text "4.8" at 994.45,596 h60
  text "5" at -537,476 h60
  text "P1" at -285.91,476 h60
  text "Copper" at 199.67,476 h60
  text "0.070mm" at 636.02,476 h60
  text "6" at -537,356 h60
  text "Dielectric 2" at -285.91,356 h60
  text "FR4" at 199.67,356 h60
  text "0.254mm" at 636.02,356 h60
  text "4.2" at 994.45,356 h60
  text "7" at -537,236 h60
  text "P2" at -285.91,236 h60
  text "Copper" at 199.67,236 h60
  text "0.070mm" at 636.02,236 h60
  text "8" at -537,116 h60
  text "Dielectric 3" at -285.91,116 h60
  text "FR-4" at 199.67,116 h60
  text "0.254mm" at 636.02,116 h60
  text "4.2" at 994.45,116 h60
  text "9" at -537,-4 h60
  text "VMOT" at -285.91,-4 h60
  text "Copper" at 199.67,-4 h60
  text "0.070mm" at 636.02,-4 h60
  text "10" at -537,-124 h60
  text "Dielectric 4" at -285.91,-124 h60
  text "FR4" at 199.67,-124 h60
  text "0.254mm" at 636.02,-124 h60
  text "4.2" at 994.45,-124 h60
  text "11" at -537,-244 h60
  text "SIG" at -285.91,-244 h60
  text "Copper" at 199.67,-244 h60
  text "0.070mm" at 636.02,-244 h60
  text "12" at -537,-364 h60
  text "Dielectric 5" at -285.91,-364 h60
  text "FR-4" at 199.67,-364 h60
  text "0.254mm" at 636.02,-364 h60
  text "4.2" at 994.45,-364 h60
  text "13" at -537,-484 h60
  text "Bottom" at -285.91,-484 h60
  text "Copper" at 199.67,-484 h60
  text "0.070mm" at 636.02,-484 h60
  text "14" at -537,-604 h60
  text "Bottom Solder" at -285.91,-604 h60
  text "Solder Resist" at 199.67,-604 h60
  text "0.010mm" at 636.02,-604 h60
  text "3.5" at 994.45,-604 h60
  text "15" at -537,-724 h60
  text "Bottom Overlay" at -285.91,-724 h60
  text "1" at -878,-864 h60
P2:
  text "3" at -798.8,-864 h60
SIG:
  text "5" at -719.6,-863.28 h60
P1:
  text "2" at -838.4,-864 h60
VMOT:
  text "4" at -759.2,-863.94 h60
Bottom:
  pour cut-out: -1065,-193 -1037.47,-193 -1012,-193 -1012,-470.48 -1290.21,-470.48 -1290.21,-193
  text "6" at -680,-864 h60

## Silkscreen, mask and mechanical layers (free items; w line width, h text height)
Top Overlay:
  rectangle: -945,-759 -842,-654
  text "S5160" at -1335,-194 h60
  text "V1.2" at -1095,-196 h60
  text "FYSETC" at -1252,-492 h60
  text "EN" at -803,-728 h60
  text "VM" at -1556,-731 h60
  text "ENCN" at -1275,-913.95 h60 r90
  text "ENCB" at -976,-915.56 h60 r90
  text "ENCA" at -1176,-918 h60 r90
  text "DIAG0" at -1074,-927.55 h60 r90
Bottom Overlay:
  text "GND" at -1217,-30 h60
  text "DIR" at -954,-32 h60
Top Solder:
  rectangle: -1255,-437 -1044,-225

## Dimensions
-842,-760 to -842,40 on Dimension
-1442,40 to -842,40 on Dimension